# EAGLE board 7SEGMENT (EAGLE 7.7.0)
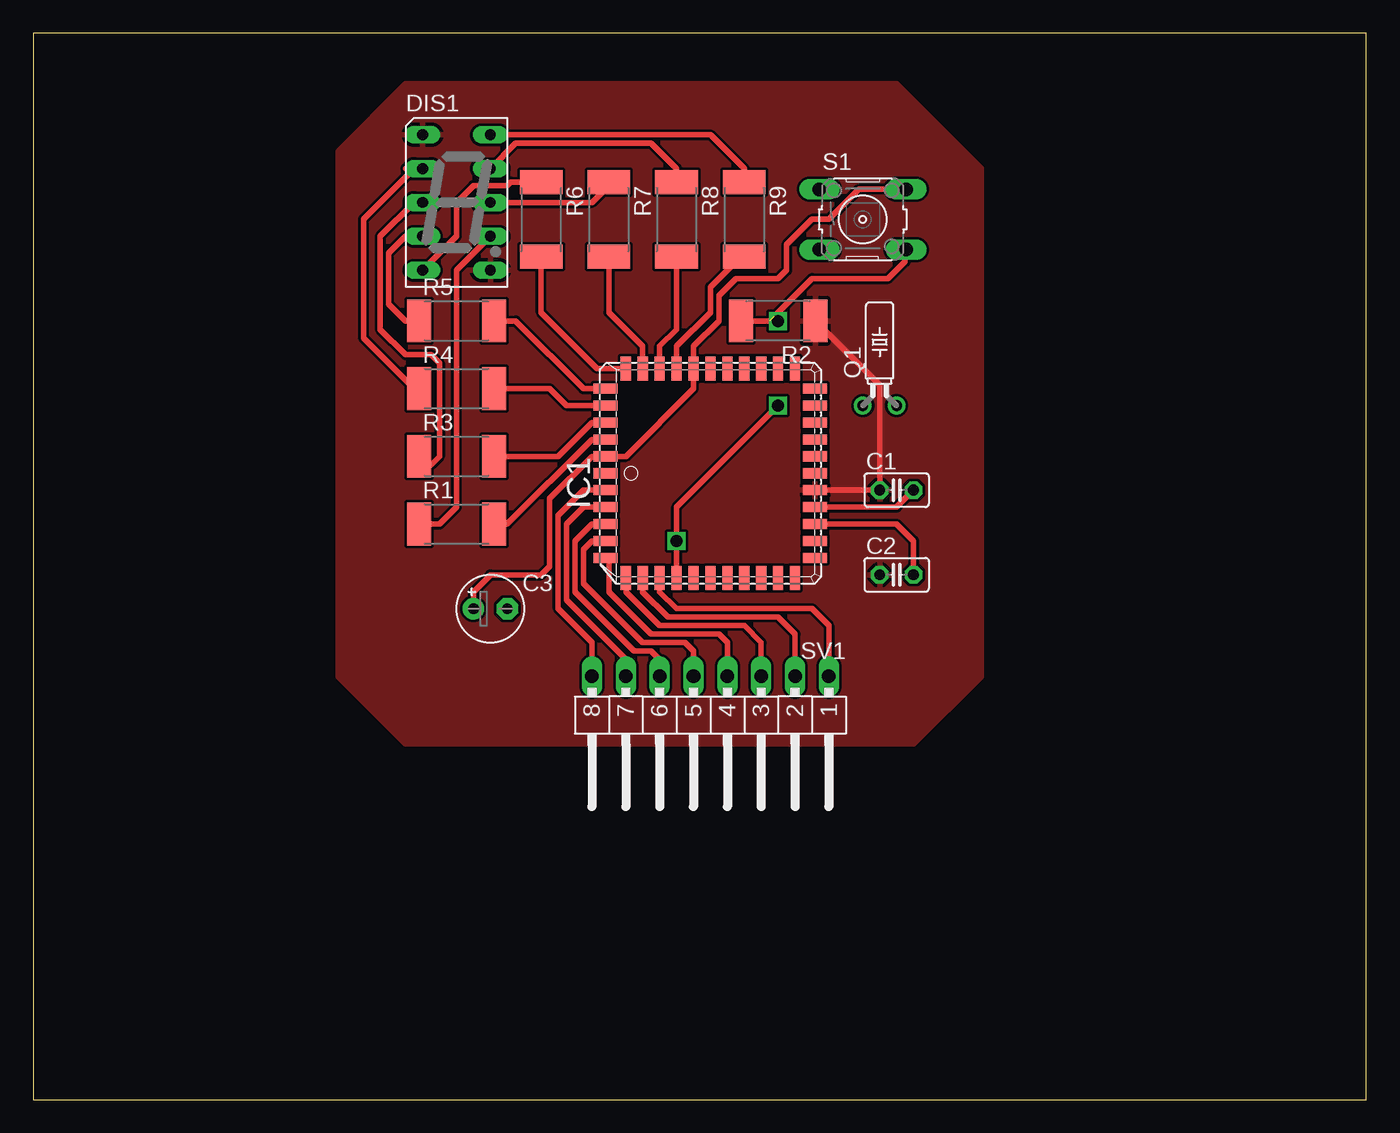
[diagram p0: board, top side]
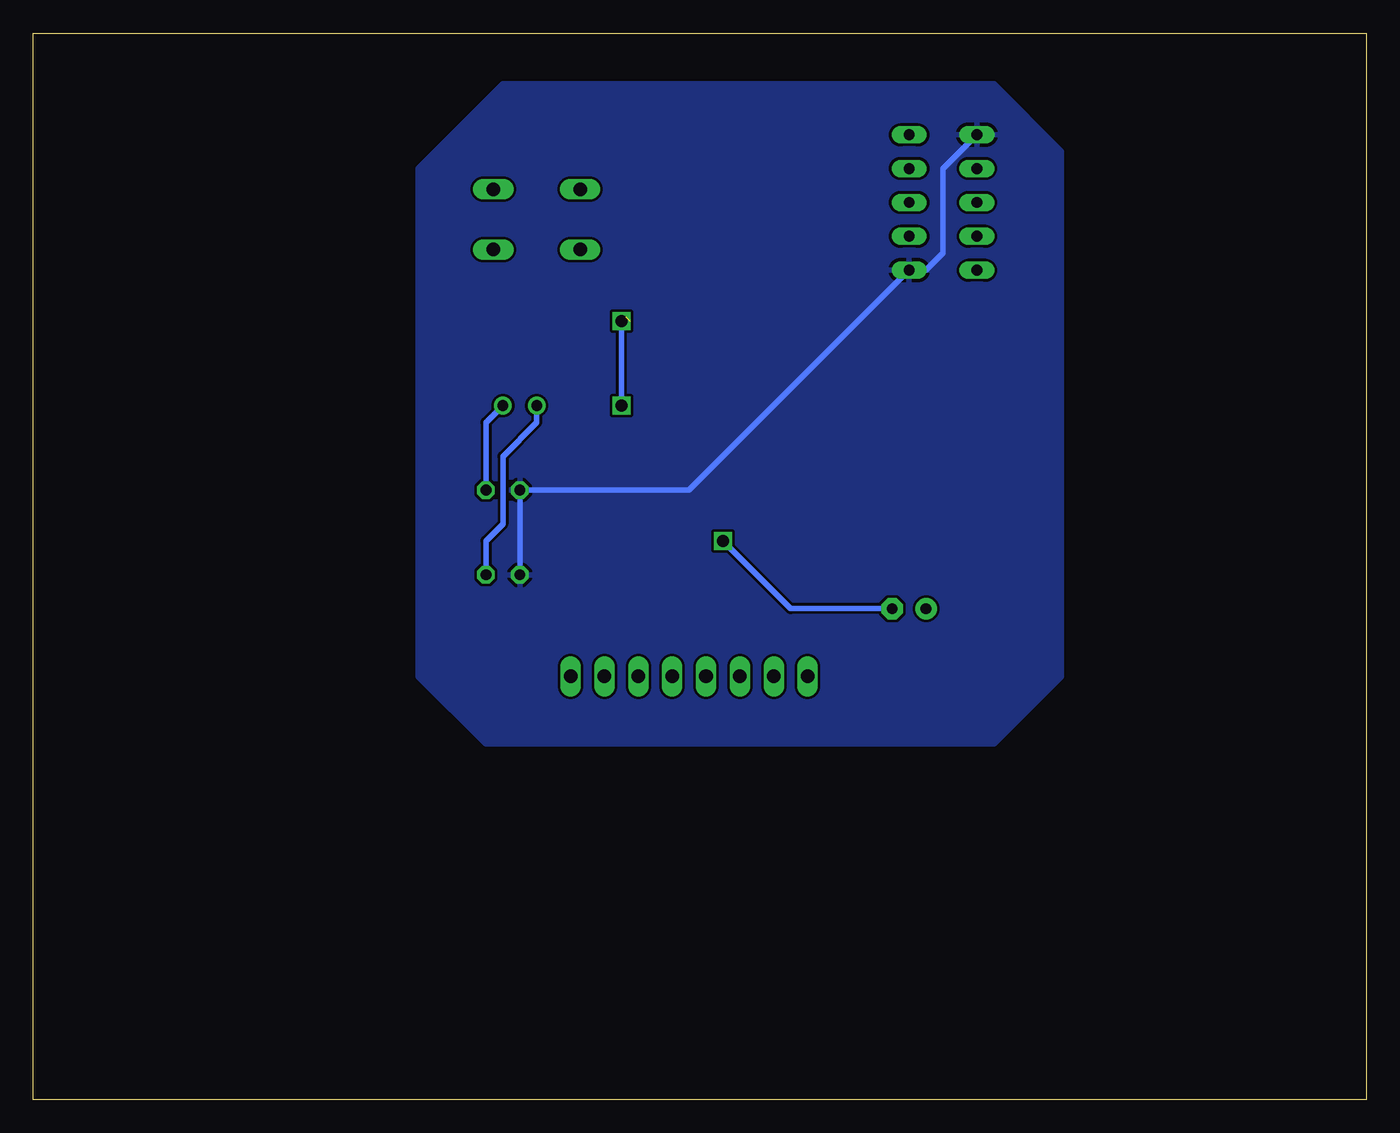
[diagram p1: board, bottom side, seen from below]

Size 100 x 80 mm. Coordinates in mm from the lower left corner, seen from the top.
Outline: 0,0 100,0 100,80 0,80 0,0
Copper layers (1*16): Top 0.035mm / dielectric 1.5mm / Bottom 0.035mm
Design rules "default": minimum track width 10mil, minimum drill 24mil, track to track 8mil, track to pad 8mil, pad to pad 8mil, via to via 8mil, smd to smd 8mil, copper to edge 40mil, drill to drill 8mil, minimum pad ring 10mil, minimum via ring 8mil, stop-mask expansion 4mil, vias tented up to drill 0mil, thermal gap 10mil

## Footprints (pad centres in the part's own frame; a part is rotated, then mirrored left to right if it is on the bottom)
C025-025X050 = drill 0.813 octagon: 1 -1.27,0; 2 1.27,0
E2,5-5 = drill 0.813 pad 1.6: + -1.27,0 | drill 0.813 pad 1.6 octagon: - 1.27,0
HDSP-A = drill 0.813 long: 1 -2.54,5.08; 2 -2.54,2.54; 3 -2.54,0; 4 -2.54,-2.54; 5 -2.54,-5.08; 6 2.54,-5.08; 7 2.54,-2.54; 8 2.54,0; 9 2.54,2.54; 10 2.54,5.08
PLCC44 = smd 1.8 x 0.76: 1 -7.86,0; 2 -7.86,-1.27; 3 -7.86,-2.54; 4 -7.86,-3.81; 5 -7.86,-5.08; 6 -7.86,-6.35; 18 7.86,-6.35; 19 7.86,-5.08; 20 7.86,-3.81; 21 7.86,-2.54; 22 7.86,-1.27; 23 7.86,0; 24 7.86,1.27; 25 7.86,2.54; 26 7.86,3.81; 27 7.86,5.08; 28 7.86,6.35; 40 -7.86,6.35; 41 -7.86,5.08; 42 -7.86,3.81; 43 -7.86,2.54; 44 -7.86,1.27 | smd 0.76 x 1.8: 7 -6.35,-7.86; 8 -5.08,-7.86; 9 -3.81,-7.86; 10 -2.54,-7.86; 11 -1.27,-7.86; 12 0,-7.86; 13 1.27,-7.86; 14 2.54,-7.86; 15 3.81,-7.86; 16 5.08,-7.86; 17 6.35,-7.86; 29 6.35,7.86; 30 5.08,7.86; 31 3.81,7.86; 32 2.54,7.86; 33 1.27,7.86; 34 0,7.86; 35 -1.27,7.86; 36 -2.54,7.86; 37 -3.81,7.86; 38 -5.08,7.86; 39 -6.35,7.86
TC26H = drill 0.813: 1 -1.27,0; 2 1.27,0
R2512 = smd 1.8 x 3.2: 1 -2.8,0; 2 2.8,0
B3F-10XX = drill 1.016 long: 1 -3.251,2.261; 2 3.251,2.261; 3 -3.251,-2.261; 4 3.251,-2.261
MA08-1W = drill 1.016 long: 1 -8.89,0; 2 -6.35,0; 3 -3.81,0; 4 -1.27,0; 5 1.27,0; 6 3.81,0; 7 6.35,0; 8 8.89,0

## Placement (x,y rotation side)
C1  33pF  [C025-025X050]  64.77,45.72 0 top
C2  33pf  [C025-025X050]  64.77,39.37 0 top
C3  10uF  [E2,5-5]  34.29,36.83 0 top
DIS1  HD-A103  [HDSP-A]  31.75,67.31 0 top
IC1  AT89C51-12JC  [PLCC44]  50.8,46.99 0 top
Q1  11.0592MHz  [TC26H]  63.5,52.07 0 top
R1  330  [R2512]  31.75,43.18 0 top
R2  8.2k  [R2512]  55.88,58.42 180 top
R3  330  [R2512]  31.75,48.26 0 top
R4  330  [R2512]  31.75,53.34 0 top
R5  330  [R2512]  31.75,58.42 0 top
R6  330  [R2512]  38.1,66.04 270 top
R7  330  [R2512]  43.18,66.04 270 top
R8  330  [R2512]  48.26,66.04 270 top
R9  330  [R2512]  53.34,66.04 270 top
S1  RESET  [B3F-10XX]  62.23,66.04 0 top
SV1  [MA08-1W]  50.8,31.75 180 top

## Library data of the parts
C1-C3 R1-R9 = rcl
DIS1 = display-hp; OC_FARNELL: unknown; OC_NEWARK: unknown
IC1 = atmel; MPN: AT89C51ED2-SLSUM; OC_FARNELL: 1095722; OC_NEWARK: 78K5790
Q1 = crystal; OC_FARNELL: unknown; OC_NEWARK: unknown
S1 = switch-omron; MPN: B3F-1000; OC_FARNELL: 176432; OC_NEWARK: 36M3542
SV1 = con-lstb; OC_FARNELL: unknown; OC_NEWARK: unknown

## Nets
GND: C1.1 C2.1 DIS1.1 DIS1.6 IC1.22 R2.1
N$1: IC1.9 SV1.1
N$2: IC1.8 SV1.2
N$3: IC1.7 SV1.3
N$4: IC1.6 SV1.4
N$5: IC1.5 SV1.5
N$6: IC1.4 SV1.6
N$7: IC1.3 SV1.7
N$8: IC1.2 SV1.8
N$9: IC1.43 R1.2
N$10: IC1.42 R3.2
N$11: IC1.41 R4.2
N$12: C1.2 IC1.21 Q1.2
N$13: C2.2 IC1.20 Q1.1
N$14: IC1.40 R5.2
N$15: IC1.39 R6.2
N$16: IC1.38 R7.2
N$17: C3.- IC1.10 R2.2 S1.4
N$18: IC1.37 R8.2
N$19: IC1.36 R9.2
N$20: DIS1.7 R1.1
N$21: DIS1.10 R9.1
N$22: DIS1.9 R8.1
N$23: DIS1.8 R7.1
N$24: DIS1.5 R6.1
N$25: DIS1.4 R5.1
N$26: DIS1.2 R4.1
N$27: DIS1.3 R3.1
VCC: C3.+ IC1.35 IC1.44 S1.2

## Tracks (layer width: path | path; a pad name or v marks a point on that pad's centre or on a via)
GND
  Top 0.406: IC1.22 C1.1 63.5,53.6 R2.1
  Bottom 0.406: C2.1 C1.1 50.8,45.72 DIS1.6 33.02,62.23 31.75,63.5 31.75,69.85 DIS1.1
  pour Top: 27.94,76.2 64.77,76.2 71.12,69.85 71.12,31.75 66.04,26.67 27.94,26.67 22.86,31.75 22.86,71.12
  pour Bottom: 27.94,76.2 64.77,76.2 71.12,69.85 71.12,31.75 66.04,26.67 27.94,26.67 22.86,31.75 22.86,71.12
N$1
  Top 0.406: IC1.9 46.99,38.1 48.26,36.83 58.42,36.83 59.69,35.56 SV1.1
N$2
  Top 0.406: SV1.2 57.15,34.92 55.88,36.2 47.62,36.2 45.72,38.1 IC1.8
N$3
  Top 0.406: SV1.3 54.61,34.29 53.34,35.56 46.99,35.56 44.45,38.1 IC1.7
N$4
  Top 0.406: SV1.4 52.07,34.29 51.44,34.92 46.35,34.92 43.18,38.1 43.18,40.4 IC1.6
N$5
  Top 0.406: SV1.5 49.53,33.66 48.9,34.29 45.72,34.29 41.27,38.73 41.27,41.27 41.91,41.91 IC1.5
N$6
  Top 0.406: SV1.6 46.99,33.02 46.35,33.66 45.09,33.66 40.64,38.1 40.64,41.91 41.91,43.18 IC1.4
N$7
  Top 0.406: SV1.7 44.45,33.02 40.01,37.47 40.01,43.18 41.27,44.45 IC1.3
N$8
  Top 0.406: SV1.8 41.91,34.29 39.37,36.83 39.37,43.81 41.27,45.72 IC1.2
N$9
  Top 0.406: IC1.43 41.91,49.53 35.56,43.18 R1.2
N$10
  Top 0.406: R3.2 39.37,48.26 41.91,50.8 IC1.42
N$11
  Top 0.406: R4.2 38.73,53.34 40.01,52.07 IC1.41
N$12
  Top 0.406: IC1.21 64.77,44.45 C1.2
  Bottom 0.406: Q1.2 66.04,50.8 C1.2
N$13
  Top 0.406: IC1.20 64.77,43.18 66.04,41.91 C2.2
  Bottom 0.406: Q1.1 62.23,50.8 64.77,48.26 64.77,43.18 66.04,41.91 C2.2
N$14
  Top 0.406: R5.2 36.2,58.42 41.27,53.34 IC1.40
N$15
  Top 0.406: IC1.39 42.3,54.85 38.1,59.05 R6.2
N$16
  Top 0.406: R7.2 43.18,59.05 45.72,56.52 IC1.38
N$17  (via drill 0.9)  (1 unrouted)
  Top 0.406: R2.2 55.24,58.42 58.42,61.59 64.14,61.59 65.41,62.87 65.41,63.7 S1.4 | IC1.10 v48.26,41.91 48.26,44.45 v55.88,52.07
  Bottom 0.406: C3.- 43.18,36.83 v48.26,41.91 | v55.88,52.07 v55.88,58.42 55.56,58.74
N$18
  Top 0.406: IC1.37 46.99,56.52 48.26,57.78 R8.2
N$19
  Top 0.406: IC1.36 48.26,56.52 50.8,59.05 50.8,60.96 53.34,63.5 R9.2
N$20
  Top 0.406: R1.1 30.48,43.18 31.75,44.45 31.75,62.23 DIS1.7
N$21
  Top 0.406: DIS1.10 50.8,72.39 53.34,69.85 R9.1
N$22
  Top 0.406: DIS1.9 36.2,71.75 46.35,71.75 48.26,69.85 R8.1
N$23
  Top 0.406: DIS1.8 41.91,67.31 43.18,68.58 R7.1
N$24
  Top 0.406: DIS1.5 31.75,64.77 31.75,67.31 33.02,68.58 35.56,68.58 35.82,68.84 R6.1
N$25
  Top 0.406: R5.1 27.94,58.42 26.67,59.69 26.67,63.5 27.94,64.77 DIS1.4
N$26
  Top 0.406: DIS1.2 28.57,69.85 | 28.57,69.85 27.94,69.85 | R4.1 28.57,53.34 24.77,57.15 24.77,66.04 28.57,69.85
N$27
  Top 0.406: DIS1.3 28.57,67.31 26.04,64.77 26.04,57.78 27.94,55.88 29.84,55.88 30.48,55.24 30.48,48.26 29.21,46.99 29.21,48 R3.1
VCC
  Top 0.406: C3.+ 33.02,38.1 34.29,39.37 38.1,39.37 38.73,40.01 38.73,45.09 41.91,48.26 IC1.44 44.45,48.26 49.53,53.34 IC1.35 49.53,56.52 51.44,58.42 51.44,60.33 52.7,61.59 55.88,61.59 56.52,62.23 56.52,64.14 58.42,66.04 59.69,66.04 61.95,68.3 S1.2